# Altium PCB PCB1.PcbDoc
Units mil, origin at the board's own origin, x right, y up, seen from the top; angles counter-clockwise.
Board outline 4877.76 x 2755.91 mil, 2 copper layers (Top Layer, Bottom Layer); 21 components, 35 nets, 156 pads, 59 vias.
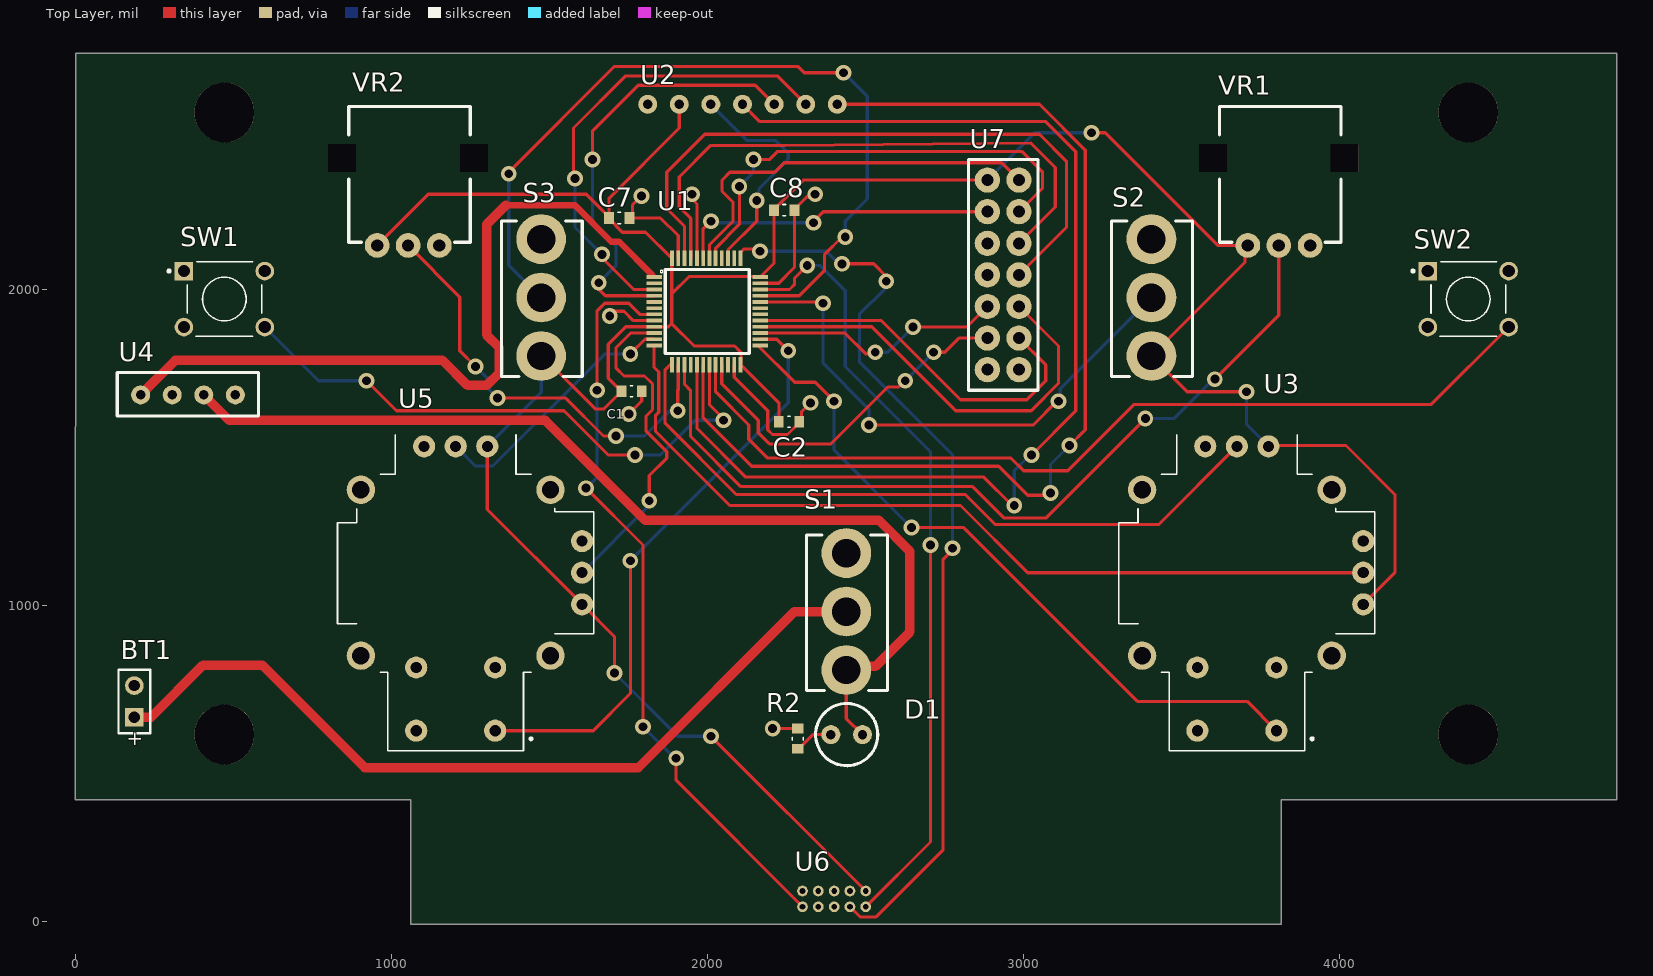
[diagram p0: Top Layer view]
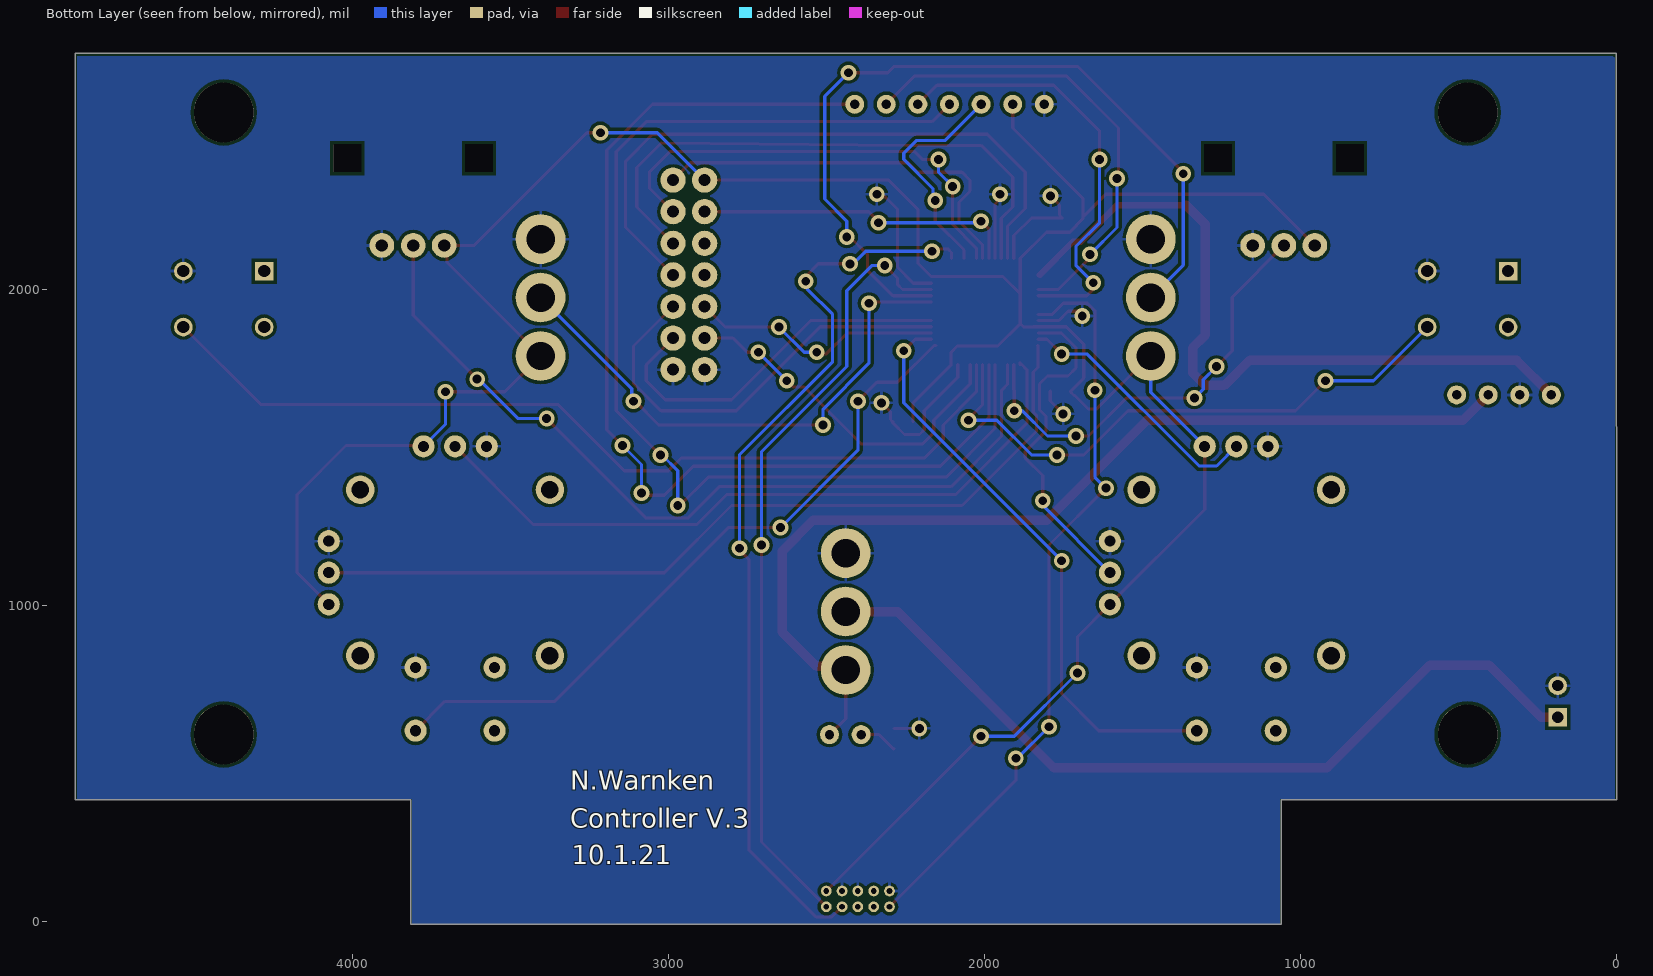
[diagram p1: Bottom Layer view, seen from below]

## Layer stack, top to bottom
Top Solder: solder mask 0.4, Solder Resist, Dk 3.5
Top Layer: signal copper 1.4
Dielectric 1: dielectric 12.6, FR-4, Dk 4.8
Bottom Layer: signal copper 1.4
Bottom Solder: solder mask 0.4, Solder Resist, Dk 3.5

## Board outline
-1.3,383.7 1060,383.7 1060,-10 3815.91,-10 3815.91,383.7 4876.46,383.7 4876.46,2745.91 -0.55,2745.91

## Design rules (kind name [scope] priority, off if disabled: settings)
Clearance [All] p1: gap=10 ignorepadtopadclearanceinfootprint=FALSE except(0: Arc-Hole Track-Hole SMDPad-Hole THPad-Hole Via-Hole Fill-Hole Poly-Hole Region-Hole Text-Hole)
PolygonConnect [All] p1: connectstyle=Relief reliefconductorwidth=10 reliefentries=4 polygonreliefangle="90 Angle" airgapwidth=10
RoutingVias [All] p1: holewidth=28 width=50 viastyle="Through Hole" minholewidth=28 minwidth=50 maxholewidth=28 maxwidth=50
SolderMaskExpansion [All] p1: expansion=4
Width [All] p1: maxlimit=60 minlimit=10 preferedwidth=10 minimp=50.000000 maximp=50.000000 favimp=50.000000
30 further rules are at their usual default settings.

## Components (designator, comment, footprint, x,y, rotation, side; value= is the part's Value field where it differs from the comment)
BT1 "Battery" BAT-2 185,695 r90 top
C1 "Cap" RESC0603 1758.88,1676.59 r0 top value=0.1uF
C2 "Cap" RESC0603 2257.28,1580 r0 top value=0.1uF
C7 "Cap" RESC0603 1720,2225 r180 top value=0.1uF
C8 "Cap" RESC0603 2242.28,2250 r180 top value=0.1uF
D1 "LED2" LED1 2489.8,590 r0 top
R2 "Res1" RESC0603 2285,577.28 r270 top value=470
S1 "SW-SPDT" "TOGGLE SWITCH" 2438.5,979.49 r0 top
S2 "SW-SPDT" "TOGGLE SWITCH" 3404.13,1973.23 r0 top
S3 "SW-SPDT" "TOGGLE SWITCH" 1472.87,1973.23 r0 top
SW1 "1825910-6" "PUSHBUTTON SWITCH - DUPLICATE" 470,1968.5 r0 top
SW2 "1825910-6" "PUSHBUTTON SWITCH - DUPLICATE" 4407.01,1968.5 r0 top
U1 "STM32L433CC" LQFP48 2166.61,2038.11 r270 top
U2 "LCD 1.3inch" LCD 1810,2585 r0 top
U3 "COM-09032" XDCR_COM-09032 3674.72,1102.36 r180 top
U4 "Pololu S7V8F3" "POLOLU S7V8F3" 505,1665 r180 top
U5 "COM-09032" XDCR_COM-09032 1202.24,1102.36 r180 top
U6 "J-link EDU Mini" "10 PIN VERTICAL" 2300,95 r0 top
U7 "Antanna" ANTANNA 2885,2345 r0 top
VR1 "Potentionetor" POTENTIOMETER 3816.46,2362.2 r0 top
VR2 "Potentionetor" POTENTIOMETER 1060.55,2362.2 r0 top

## Footprints (in the part's own frame and the unit in brackets; to place one, negate y for a bottom-side part, rotate by r counter-clockwise, add the part's x,y. Pads: shape width x height; smd on the part's side, far side on the other; paste and mask are expansions set on the pad)
"10 PIN VERTICAL" [mil]
  round 34 hole 18: 1(0,0) 2(50,0) 3(100,0) 4(150,0) 5(200,0) 6(200,-50) 7(150,-50) 8(100,-50) 9(50,-50) 10(0,-50)
ANTANNA [mil]
  round 80 hole 38: 1(0,0) 2(0,-100) 3(0,-200) 4(0,-300) 5(0,-400) 6(0,-500) 7(0,-600) 8(100,-600) 9(100,-500) 10(100,-400) 11(100,-300) 12(100,-200) 13(100,-100) 14(100,0)
  silkscreen extent -60,-665 160,65
BAT-2 [mm] "Battery; 2 Leads"
  rect 1.5x1.5 hole 0.9: 1(-1.27,0)
  round 1.5 hole 0.9: 2(1.27,0)
  silkscreen extent -2.54,-1.27 2.54,1.27
LCD [mil] "1.3 LCD Display"
  round 60 hole 30: 1(0,0) 2(100,0) 3(200,0) 4(300,0) 5(400,0) 6(500,0) 7(600,0)
LED1 [mil]
  round 60 hole 30: 1(0,0) 2(-100,0)
  silkscreen extent -148,-98 48,98
LQFP48 [mm] "Low-profile quad flat-package"
  rect 0.3x1.25 smd: 1(0,-8.55) 2(0.5,-8.55) 3(1,-8.55) 4(1.5,-8.55) 5(2,-8.55) 6(2.5,-8.55) 7(3,-8.55) 8(3.5,-8.55) 9(4,-8.55) 10(4.5,-8.55) 11(5,-8.55) 12(5.5,-8.55) 25(5.5,0) 26(5,0) 27(4.5,0) 28(4,0) 29(3.5,0) 30(3,0) 31(2.5,0) 32(2,0) 33(1.5,0) 34(1,0) 35(0.5,0) 36(0,0)
  rect 1.25x0.3 smd: 13(7.05,-7.1) 14(7.05,-6.6) 15(7.05,-6.1) 16(7.05,-5.6) 17(7.05,-5.1) 18(7.05,-4.6) 19(7.05,-4.1) 20(7.05,-3.6) 21(7.05,-3.1) 22(7.05,-2.6) 23(7.05,-2.1) 24(7.05,-1.6) 37(-1.5,-1.6) 38(-1.5,-2.1) 39(-1.5,-2.6) 40(-1.5,-3.1) 41(-1.5,-3.6) 42(-1.5,-4.1) 43(-1.5,-4.6) 44(-1.5,-5.1) 45(-1.5,-5.6) 46(-1.5,-6.1) 47(-1.5,-6.6) 48(-1.5,-7.1)
  silkscreen extent -0.6,-8.05 6.15,-0.9
"POLOLU S7V8F3" [mil]
  round 60 hole 30: 1(0,0) 2(100,0) 3(200,0) 4(300,0)
  silkscreen extent -73,-71 374,67
POTENTIOMETER [mil]
  round 78 hole 39: 1(-107,-224) 2(-9,-224) 3(90,-224)
  rect 87x87 hole 87 square: ""(-217.5,52) ""(199.5,52)
  silkscreen extent -197,-214 188,216
"PUSHBUTTON SWITCH - DUPLICATE" [mm]
  rect 1.498x1.498 hole 0.99: 1(-3.25,2.25)
  round 1.498 hole 0.99: 2(3.25,2.25) 3(-3.25,-2.25) 4(3.25,-2.25)
  silkscreen extent -4.54,-3 3,3
RESC0603 [mm]
  rect 0.79x0.93 smd: 1(-0.82,0) 2(0.82,0)
  silkscreen extent -0.11,-0.45 0.11,0.45
"TOGGLE SWITCH" [mm]
  round 4 hole 2.286: 1(0,4.699) 2(0,0) 3(0,-4.699)
  silkscreen extent -3.2,-6.35 3.3,6.15
XDCR_COM-09032 [mil]
  round 70 hole 35.43: B1A(-125,500) B1B(125,500) B2A(-125,300) B2B(125,300)
  round 70 hole 35: H1(-100,-400) H2(0,-400) H3(100,-400) V1(-400,100) V2(-400,0) V3(-400,-100)
  round 90 hole 55: S1(-300,262.5) S2(-300,-262.5) S3(300,-262.5) S4(300,262.5)
  silkscreen extent -437,-437 374,563

## Part data
BT1: "Multicell Battery", LatestRevisionDate=17-Jul-2002, LatestRevisionNote="Re-released for DXP Platform.", PackageDescription="Battery; 2 Leads", PackageReference=BAT-2, Published=24-Mar-1999, Publisher="Altium Limited"
C1 C2 C7 C8: "Capacitor", LatestRevisionDate=17-Jul-2002, LatestRevisionNote="Re-released for DXP Platform.", PackageDescription="Radial Cap, Thru-Hole; 2 Leads; 0.3 in Pin Spacing", PackageReference=RAD-0.3, Published=8-Jun-2000, Publisher="Altium Limited"
D1: "Typical RED, GREEN, YELLOW, AMBER GaAs LED", LatestRevisionDate=17-Jul-2002, LatestRevisionNote="Re-released for DXP Platform.", PackageDescription="SM LED; 2 Flat Leads", PackageReference=3.2X1.6X1.1, PackageVersion=Feb-2002, Published=8-Jun-2000, Publisher="Altium Limited"
R2: "Resistor", LatestRevisionDate=17-Jul-2002, LatestRevisionNote="Re-released for DXP Platform.", PackageDescription="Axial Device, Thru-Hole; 2 Leads; 0.3 in Pin Spacing", PackageReference=AXIAL-0.3, Published=8-Jun-2000, Publisher="Altium Limited"
S1 S2 S3: "SPDT Subminiature Toggle Switch, Right Angle Mounting, Vertical Actuation", ComponentLink1Description="Manufacturer Link", ComponentLink1URL=http://www.apem.com, DatasheetVersion=05-Dec-2000, LatestRevisionDate=17-Dec-2003, LatestRevisionNote="Schematic revised, PCB Footprint replaced.", PackageDescription="Switch; 4 Leads", PackageReference=TL36WW15050, Published=24-Mar-1999, Publisher="Altium Limited"
SW1 SW2: "6MM TACT SWITCH, HIGH TEMP", Contact_Current_Rating="50 mA", Package=None, Configuration_Pole-Throw="Single Pole - Single Throw", Digi-Key_Part_Number=450-1650-ND, Digi-Key_Purchase_URL=https://www.digikey.com.au/product-detail/en/te-connectivity-alcoswitch-switches/1825910-6/450-1650-ND/1632536?utm_source=snapeda&utm_medium=aggregator&utm_campaign=symbol, EU_RoHS_Compliance=Compliant, MF="TE Connectivity", MP=1825910-6, SnapEDA_Link=https://www.snapeda.com/parts/1825910-6/TE%20Connectivity%20ALCOSWITCH%20Switches/view-part/?ref=snap, TE_purchase_URL=https://www.te.com/usa-en/product-1825910-6.html?te_bu=Cor&te_type=disp&te_campaign=seda_glo_cor-seda-global-disp-prtnr-fy19-seda-model-bom-cta_sma-317_1&elqCampaignId=32493
U3 U5: "Joystick, 2 - Axis Analog _Resistive_ Output", Package="SparkFun Electronics", Availability=Unavailable, MF="SparkFun Electronics", MP=COM-09032, Price=None, SnapEDA_Link=https://www.snapeda.com/parts/COM-09032/SparkFun%20Electronics/view-part/888157/?ref=snap

## Free pads (board coordinates)
  round 188.98 hole 188.98: 152(470,590.55) 152(470,2559.06) 152(4407.01,590.55) 152(4407.01,2559.06)

## Via types
v1: diameter 50, hole 28, Top Layer to Bottom Layer, 59 vias

## Nets (pads, with @x,y where several pads share a name; then routed paths per layer and width w, separated by ;. In a path a pad name is that pad's centre, name@x,y a point inside that pad or via, vN(x,y) a via of type N, cw(c..) or ccw(c..) an arc to the next point about the centre after c; other vN are vias at no path point)
ADC1_CH1: U1.10 U5.V2 | length 1083.5
  Top Layer w10: v1(1815,1330) 1815,1410 1870,1465 1870,1485 1805,1550 1805,1598.43 1825,1618.43 1825,1700 1800,1725 1735,1725 1710,1750 1710,1815 1755.95,1860.95 U1.10
  Bottom Layer w10: U5.V2 1807.35,1307.46 1807.35,1322.35 v1(1815,1330)
ADC1_CH2: U1.11 U5.H2 | length 819.8
  Top Layer w10: v1(1755,1795) 1801.26,1841.26 U1.11
  Bottom Layer w10: U5.H2 1264.61,1440 1320,1440 1675,1795 v1(1755,1795)
ADC1_CH3: U1.12 U3.V2 | length 2710
  Top Layer w10: U1.12 1831.57,1821.57 1830,1820 1830,1752.5 1845,1737.5 1845,1610 1834.14,1599.14 1834.14,1550.86 2070,1315 2800,1315 3012.64,1102.36 U3.V2
ADC1_CH4: U1.13 U3.H2 | length 2252.5
  Top Layer w10: U1.13 1887.09,1767.09 1883.82,1763.82 1865,1745 1865,1575 2090,1350 2815,1350 2910,1255 3427.36,1255 U3.H2
ADC1_CH5: U1.14 VR2.2 | length 1400.1
  Top Layer w10: VR2.2 1215,1974.76 1215,1805 v1(1265,1755) ; v1(1335,1655) 1550,1655 1670,1535 v1(1710,1535) ; v1(1905,1615) 1905,1680 1906.46,1681.46 ; 1906.46,1681.77 1906.46,1681.46 ; U1.14 1906.77,1681.77 1906.46,1681.46
  Bottom Layer w10: v1(1265,1755) 1306.72,1713.28 1306.72,1683.28 v1(1335,1655) ; v1(1710,1535) 1800,1535 1880,1615 v1(1905,1615)
ADC1_CH6: U1.15 VR1.2 | length 2690.2
  Top Layer w10: U1.15 1926.46,1698.54 1945,1680 1945,1535 2105,1375 2838.28,1375 2938.28,1275 3070,1275 v1(3385,1590) ; v1(3605,1715) 3807.46,1917.46 VR1.2
  Bottom Layer w10: v1(3385,1590) 3475,1590 3600,1715 v1(3605,1715)
Button1: SW1.4 U1.19 | length 1839.4
  Top Layer w10: v1(920,1710) 1015,1615 1545,1615 1685,1475 v1(1770,1475) ; U1.19 2005.2,1634.8 2050,1590 v1(2050,1585)
  Bottom Layer w10: SW1.4 767.87,1710 v1(920,1710) ; v1(1770,1475) 1850,1475 1960,1585 v1@2030,1585
Button2: SW2.4 U1.20 | length 2913.9
  Top Layer w10: U1.20 2024.88,1675.12 2130,1570 2130,1525 2190,1465 2960,1465 3000,1425 3140,1425 3350,1635 4290.04,1635 SW2.4
Button3: U1.26 U5.B1A | length 1872
  Top Layer w10: U5.B1A 1637.36,602.36 1755,720 v1(1755,1140) ; U1.26 2218.74,1841.26 v1(2255,1805)
  Bottom Layer w10: v1(1755,1140) 2255,1640 v1(2255,1805)
Button4: U1.25 U3.B1A | length 2242.1
  Top Layer w10: U1.25@2153.43,1821.57 2158.43,1821.57 2275,1705 2340,1705 v1(2400,1645) ; v1(2645,1245) 2810,1245 3360,695 3707.09,695 U3.B1A
  Bottom Layer w10: v1(2400,1645) 2400,1490 v1(2645,1245)
CD: U1.45 U7.12 | length 1824
  Top Layer w10: U1.45 1946.14,2223.86 1910,2260 1910,2355 2010,2455 2245,2455 3022.5,2462.5 3100,2385 3100,2260 U7.12
CE: U1.43 U7.2 | length 1022.7
  Top Layer w10: U1.43 1984.76,2189.35 v1(2010,2215) ; v1(2335,2210) 2335,2215 2365,2245 U7.2
  Bottom Layer w10: v1(2010,2215) 2015,2210 v1(2335,2210)
DR: U1.46 U7.11 | length 2068.3
  Top Layer w10: U1.46 1926.46,2198.54 1870,2255 1870,2370 1990,2490 3050,2490 3135,2405 3135,2195 U7.11
GND: BT1.2 C1.2 C2.2 C7.1 C8.1 R2.1 S1.1 S2.1 S3.1 SW1.2 SW2.2 U1.8 U1.23 U1.35 U1.44 U1.47 U2.1 U3.B2A U3.H3 U3.V3 U4.3 U5.B2A U5.H3 U5.V3 U6.1 U6.3 U6.4 U7.7 U7.8 VR1.3 VR2.3 | length 1724.1
  Top Layer w10: v1(1690,1915) 1690,1920 1700,1930 1735,1930 1764.68,1900.32 U1.8 ; v1(1750.25,1605) 1791.16,1645.91 C1.2 ; v1(1790,2295) 1761.72,2266.72 1761.72,2234.43 C7.1 1850,2225 1906.77,2169.51 U1.47 ; v1(1950,2300) 1945,2295 1945,2290 1965.83,2269.17 U1.44 ; U1.23 2083.94,1721.06 2190,1615 2190,1555 2205,1540 2252.32,1540 2289.57,1577.24 C2.2 2296.72,1587.15 2296.72,1611.72 v1(2325,1640) ; U1.35 2225,2018.43 2274.57,2069.57 C8.1 2274.57,2252.76 2314.16,2292.35 2332.35,2292.35 v1(2340,2300) ; v1(2205.43,609.57) R2.1
LCD_DC: U1.3 U2.6 | length 1494.8
  Top Layer w10: v1(1580,2350) 1575,2355 1575,2510 1740,2675 2220,2675 U2.6 ; v1(1665,2110) 1665,2100 1735,2030 1765.04,1999.37 U1.3
  Bottom Layer w10: v1(1580,2350) 1580,2195 v1(1665,2110)
LCD_RES: U1.4 U2.5 | length 1397.4
  Top Layer w10: v1(1635,2410) 1635,2500 1780,2645 2150,2645 U2.5 ; v1(1655,2020) 1655,2000 1675.94,1979.06 U1.4
  Bottom Layer w10: v1(1635,2410) 1635,2210 1710,2135 1710,2075 v1(1655,2020)
NetBT1_1: BT1.1 S1.2 | length 2661.3
  Top Layer w30: BT1.1 237.87,645 402.87,810 590,810 915,485 1780,485 2274.49,979.49 S1.2
NetD1_1: D1.1 S1.3 U4.2 | length 3171.1
  Top Layer w9: S1.3 S1.3@2449.76,805.74
  Top Layer w10: S1.3 2438.5,640.55 D1.1@2488.5,590.55
  Top Layer w30: U4.2 485,1585 1485,1585 1801.77,1268.23 2541.77,1268.23 2640,1170 2640,915 2530.74,805.74 S1.3@2449.76,805.74
NetD1_2: D1.2 R2.2 | length 123.4
  Top Layer w9: R2.2 R2.2@2287.76,545
  Top Layer w10: R2.2@2287.76,545 2332.76,590 D1.2
PWR_CTR: U1.41 U7.13 | length 1470.9
  Top Layer w10: U1.41 2024.88,2129.88 2100,2205 v1(2100,2325) ; v1(2145,2410) 2195,2410 2220,2435 2995,2435 3060,2370 3060,2320 U7.13
  Bottom Layer w10: v1(2100,2325) 2145,2370 v1(2145,2410)
RST: U1.7 U6.10 | length 2391.9
  Top Layer w10: v1(1615,1370) 1795,1190 v1(1795,615) ; v1(1650,1680) 1650,1931.57 1673.43,1955 1750,1955 1785,1920 U1.7 ; v1(1900,515) 1900,445 U6.10
  Bottom Layer w10: v1(1615,1370) 1650,1405 v1(1650,1680) ; v1(1795,615) 1895,515 v1(1900,515)
SPI1_CS: U1.18 U2.7 | length 3347.6
  Top Layer w10: U1.18 1985.51,1592.92 2139.22,1439.22 2920.78,1439.22 3012.65,1347.35 3077.35,1347.35 v1(3085,1355) ; U2.7 3050,2585 3195,2440 3195,1555 v1(3145,1505)
  Bottom Layer w10: v1(3085,1355) 3085,1445 v1(3145,1505)
SPI1_MOSI: U1.17 U2.4 | length 3627.5
  Top Layer w10: U1.17 1965.83,1559.17 2120,1405 2873.43,1405 2963.43,1315 v1(2970,1315) ; U2.4 2165,2530 3070,2530 3165,2435 3165,1615 v1(3025,1475)
  Bottom Layer w10: v1(2970,1315) 2970,1425 3020,1475 v1(3025,1475)
SPI1_SCK: U1.39 U2.3 | length 721
  Top Layer w10: U1.39 2064.25,2124.25 2155,2215 v1(2155,2280)
  Bottom Layer w10: U2.3 2125,2470 2215,2470 2255,2430 2255,2410.82 2162.65,2318.48 2162.65,2287.65 v1(2155,2280)
SPI2_CS: U1.29 U7.9 | length 1202.3
  Top Layer w10: U1.29 2410,1900.32 ; 2410,1900.63 2549.37,1900.63 2800,1650 3010,1650 3070,1710 3070,1760 U7.9
SPI2_MISO: U1.27 U7.5 | length 807.8
  Top Layer w10: U1.27 2434.06,1860.95 2500,1795 2525,1795 v1(2530,1800) ; v1(2650,1880) 2820,1880 U7.5
  Bottom Layer w10: v1(2530,1800) 2570,1800 v1(2650,1880)
SPI2_MOSI: U1.28 U7.10 | length 1384.5
  Top Layer w10: U1.28 2519.37,1880.63 2785,1615 3023.43,1615 3110,1701.57 3110,1820 U7.10
SPI2_SCK: U1.21 U7.6 | length 1141.6
  Top Layer w10: U1.21 2044.57,1700 2160,1584.57 2160,1545 2195,1510 2390,1510 2570,1690 2605,1690 v1(2625,1710) ; v1(2715,1800) 2750,1800 2795,1845 U7.6
  Bottom Layer w10: v1(2625,1710) v1(2715,1800)
SWITCH1: S2.2 U1.32 | length 1726.4
  Top Layer w10: U1.32 2360.63,1959.37 v1(2365,1955) ; v1(2510,1570) 3030,1570 3105,1645 v1(3110,1645)
  Bottom Layer w10: v1(2365,1955) 2365,1765 2510,1620 v1(2510,1570) ; v1(3110,1645) 3115.91,1650.91 3115.91,1685 S2.2
SWITCH2: S3.2 U1.33 | length 2601.2
  Top Layer w10: v1(1370,2365) 1370,2370 1705,2705 2285,2705 2305,2685 v1(2430,2685) ; U1.33 2289.06,1979.06 2370,2060 2370,2110 2425,2165 v1(2435,2165)
  Bottom Layer w10: v1(1370,2365) 1370,2076.1 S3.2 ; v1(2430,2685) 2505,2610 2505,2285 2435,2215 v1(2435,2165)
SYS_JTCK-SWCLK: U1.37 U6.7 | length 2901.8
  Top Layer w10: U1.37 2103.62,2115.87 2115,2127.24 2147.76,2127.24 2155,2120 v1(2165,2120) ; v1(2425,2080) 2525,2080 2565,2040 v1(2565,2025) ; U6.7 2482,13 2533,13 2745,225 2745,1145 2775,1175 v1(2775,1180)
  Bottom Layer w10: v1(2165,2120) 2375,2120 2415,2080 v1(2425,2080) ; v1(2565,2025) 2560,2020 2560,2000 2480,1920 2480,1770 2775,1475 v1(2775,1180)
SYS_JTMS-SWDIO: U1.34 U6.6 | length 2491.6
  Top Layer w10: U1.34 2258.74,1998.74 2275,2015 2275,2035 v1(2315,2075) ; U6.6 2705,250 v1(2705,1190)
  Bottom Layer w10: v1(2315,2075) 2355,2075 2435,1995 2435,1755 2705,1485 v1(2705,1190)
TXE: U1.42 U7.14 | length 1278.8
  Top Layer w10: U1.42 2005.02,2139.65 2050,2185 2080,2215 2080,2275 2045,2310 2045,2345 2070,2370 2211.57,2370 2241.57,2400 2930,2400 U7.14
VBAT: U1.1 U4.4 | length 2357.6
  Top Layer w20: 1360,2265 1580,2265 1695,2150 1719.33,2150 1824.67,2044.67
  Top Layer w30: U4.4 315,1775 1160,1775 1240,1695 1300,1695 1340,1735 1340,1815 1300,1855 1300,2205 1360,2265
VCC: C1.1 C2.1 C7.2 C8.2 S2.3 S3.3 U1.9 U1.24 U1.36 U1.48 U2.2 U3.H1 U3.V1 U5.H1 U5.V1 U6.5 U7.1 VR1.1 VR2.1 | length 9521.3
  Top Layer w10: VR2.1 1115.35,2300 1615.47,2300 C7.2@1687.72,2227.76 ; U5.H1 1302.24,1302.36 U5.V1 1705,899.61 v1(1705,785) ; S3.3 1476.77,1788.23 1645,1620 1670,1620 1713.29,1663.29 1716.04,1663.29 1726.59,1673.84 C1.1 1685,1718.19 1685,1825 1740.63,1880.63 U1.9 1845.63,1880.63 1845,1880 1875,1880 1885.87,1890.87 ; U2.2 1910,2510 1687.72,2287.72 C7.2@1687.72,2227.76 ; v1(2010,585) U6.5 ; C2.1 2225,1640.39 2104.84,1760.55 2104.84,1800.16 2085,1820 1956.73,1820 1885.87,1890.87 ; U7.1 2302.24,2345 2210,2252.76 C8.2 2210,2082.72 2167.28,2040 1940.87,2040 1885.87,1985 ; v1(3215,2495) 3257.54,2495 3614.34,2138.2 VR1.1 3700.11,2128.86 3700.11,2084.2 S2.3 3517.36,1675 v1(3705,1675) ; U3.H1 3777.36,1505 4020,1505 4175,1350 4175,1102.64 U3.V1 ; C7.2@1687.72,2227.76 C7.2 1687.72,2222.24 1729.96,2180 1803.03,2180 1885.87,2097.17 1885.87,1985 ; 1885.87,1890.87 1885.87,1985
  Bottom Layer w10: U5.H1 1472.87,1672.99 S3.3 S3.3@1497.21,1788.23 ; v1(1705,785) 1905,585 v1(2010,585) ; U7.1 3035,2495 v1(3215,2495) ; v1(3705,1675) 3705,1572.09 U3.H1
pads on no net: SW1.1 SW1.3 SW2.1 SW2.3 U1.2 U1.5 U1.6 U1.16 U1.22 U1.30 U1.31 U1.38 U1.40 U3.B1B U3.B2B U3.S1 U3.S2 U3.S3 U3.S4 U4.1 U5.B1B U5.B2B U5.S1 U5.S2 U5.S3 U5.S4 U6.2 U6.8 U6.9 U7.3 U7.4 VR1. VR2.

## Polygon pours and split planes (outlines as drawn)
GND on Bottom Layer "Bottom Layer-GND" (solid, pour order 2): 10.06,2736.95 4870.06,2736.95 4870.06,386.95 3810.06,386.95 3810.06,-8.05 1065.06,-8.05 1065.06,386.95 5.06,386.95 5.06,2731.95
no net on Bottom Layer "Bottom Layer-No Net" (solid, pour order 0): 10,2740

## Silkscreen, mask and mechanical layers (free items; w line width, h text height)
Bottom Overlay:
  text "N.Warnken" at 3310,415 h60
  text "Controller V.3" at 3310,295 h60
  text "10.1.21" at 3305,180 h60
Mechanical 1:
  lines w10: -1.3,383.7 1059.25,383.7 ; -0.55,384.45 -0.55,2745.91 4876.46,2745.91 4876.46,383.7 3815.91,383.7 3815.91,-10 1060,-10 1060,383.7

## Text inside footprints (layer, text, board x,y; h text height)
BT1: Top Overlay "+" at 207.72,550.51 h45.28 r90